# Altium PCB pcb_DPN_ControlLed.PcbDoc
Units mil, origin at the board's own origin, x right, y up, seen from the top; angles counter-clockwise.
Board outline 6475 x 3830 mil, 2 copper layers (Top Layer, Bottom Layer); 88 components, 86 nets, 316 pads, 411 vias.
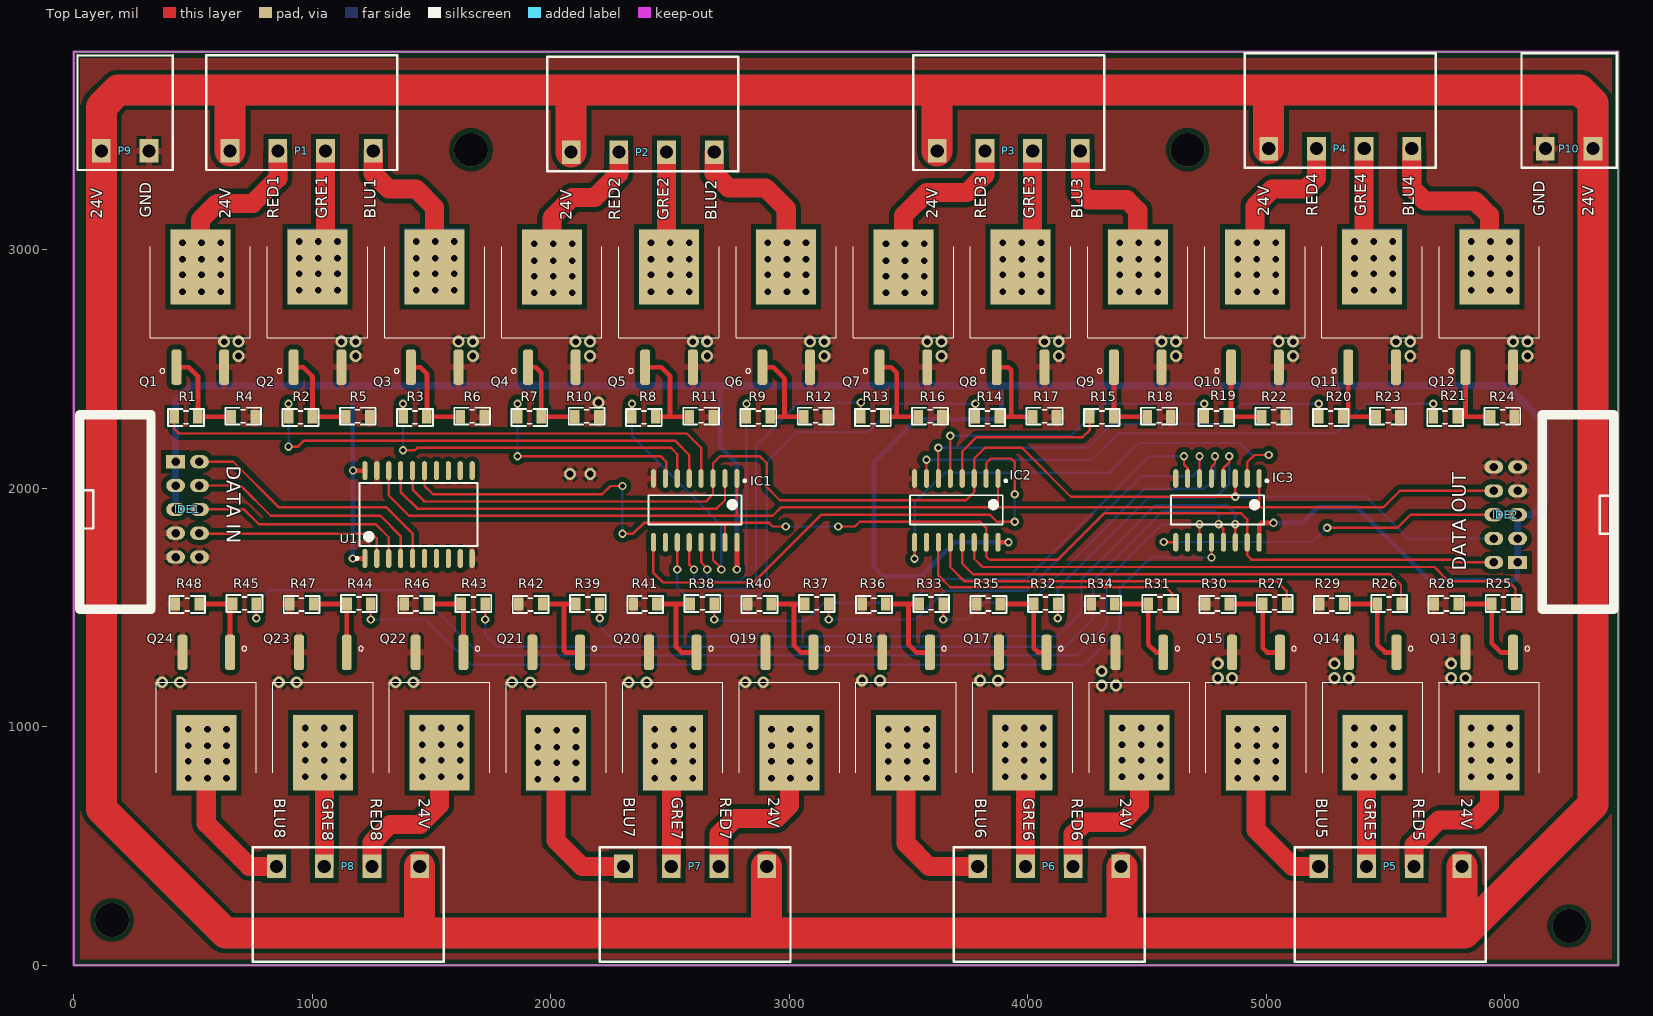
[diagram p0: Top Layer view]
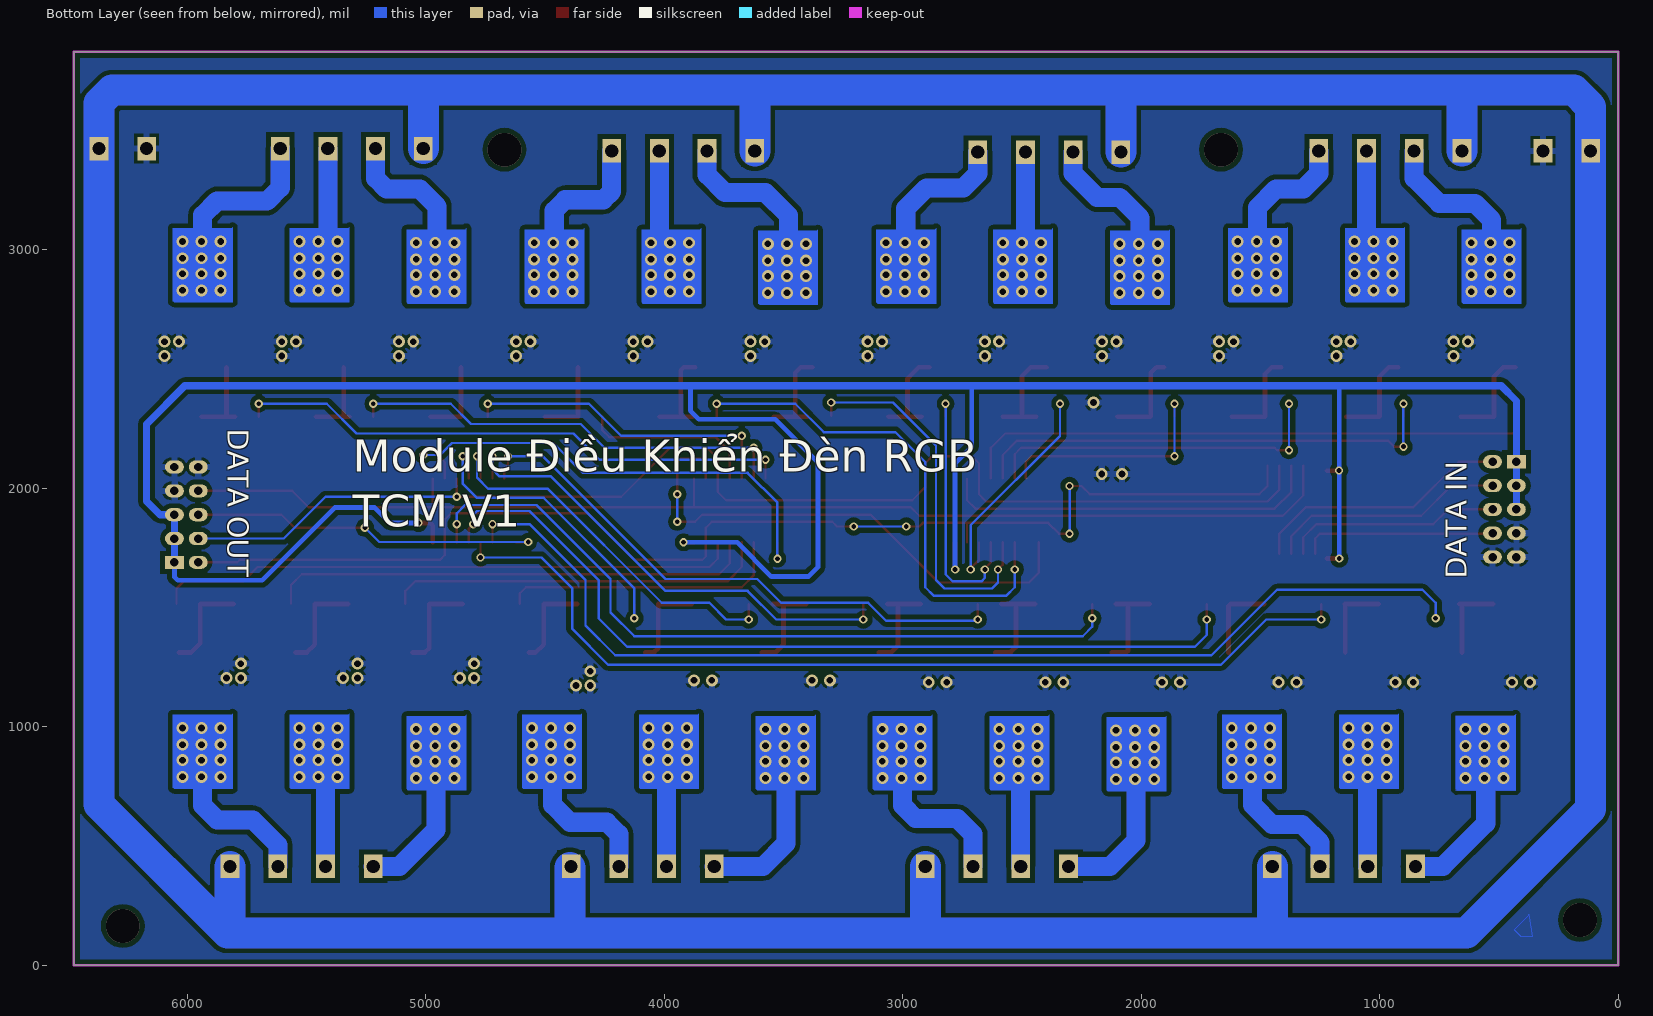
[diagram p1: Bottom Layer view, seen from below]

## Layer stack, top to bottom
Top Solder: solder mask 0.4, Solder Resist, Dk 3.5
Top Layer: signal copper 1.4
Dielectric 1: dielectric 12.6, FR-4, Dk 4.8
Bottom Layer: signal copper 1.4
Bottom Solder: solder mask 0.4, Solder Resist, Dk 3.5

## Board outline
0,0 0,3830 6475,3830 6475,0

## Design rules (kind name [scope] priority, off if disabled: settings)
Clearance [All] p1: gap=20 ignorepadtopadclearanceinfootprint=FALSE
PolygonConnect [All] p1: connectstyle=Relief reliefconductorwidth=27.56 reliefentries=4 polygonreliefangle="90 Angle" airgapwidth=11.81
RoutingVias [All] p1: holewidth=20 width=35 viastyle="Through Hole" minholewidth=20 minwidth=35 maxholewidth=20 maxwidth=35
SolderMaskExpansion [All] p1: expansion=4
Width [All] p1: maxlimit=30 minlimit=10 preferedwidth=20
30 further rules are at their usual default settings.

## Components (designator, comment, footprint, x,y, rotation, side; value= is the part's Value field where it differs from the comment)
IC1 "CD4094" CD4094 2400,2140 r270 top
IC2 "CD4094" CD4094 3495,2140 r270 top
IC3 "CD4094" CD4094 4590,2140 r270 top locked
IDE1 "IDE10" IDE10_Cong 205,1505 r0 top locked
IDE2 "IDE10" IDE10_Cong 6275,2296.34 r180 top
P1 "CON 4 EDG5.08" "CON 4 4EDG5.08" 655,3415 r0 top
P2 "CON 4 EDG5.08" "CON 4 4EDG5.08" 2085,3410 r0 top
P3 "CON 4 EDG5.08" "CON 4 4EDG5.08" 3620,3415 r0 top
P4 "CON 4 EDG5.08" "CON 4 4EDG5.08" 5010,3425 r0 top
P5 "CON 4 EDG5.08" "CON 4 4EDG5.08" 5820,415 r180 top
P6 "CON 4 EDG5.08" "CON 4 4EDG5.08" 4390,415 r180 top
P7 "CON 4 EDG5.08" "CON 4 4EDG5.08" 2905,415 r180 top
P8 "CON 4 EDG5.08" "CON 4 4EDG5.08" 1450,415 r180 top
P9 "CON 2 EDG5.08" "CON 2 2EDG5.08" 115,3415 r0 top
P10 "CON 2 EDG5.08" "CON 2 2EDG5.08" 6170,3425 r0 top
Q1 "IRF3709" D2PAK 530,2760 r0 top
Q2 "IRF3709" D2PAK 1021.36,2760 r0 top
Q3 "IRF3709" D2PAK 1512.73,2760 r0 top
Q4 "IRF3709" D2PAK 2004.09,2760 r0 top
Q5 "IRF3709" D2PAK 2495.45,2760 r0 top
Q6 "IRF3709" D2PAK 2986.82,2760 r0 top
Q7 "IRF3709" D2PAK 3478.18,2760 r0 top
Q8 "IRF3709" D2PAK 3969.54,2760 r0 top
Q9 "IRF3709" D2PAK 4460.91,2760 r0 top
Q10 "IRF3709" D2PAK 4952.27,2760 r0 top
Q11 "IRF3709" D2PAK 5443.64,2760 r0 top
Q12 "IRF3709" D2PAK 5935,2760 r0 top
Q13 "IRF3709" D2PAK 5935,1060 r180 top
Q14 "IRF3709" D2PAK 5445.91,1060 r180 top
Q15 "IRF3709" D2PAK 4956.82,1060 r180 top
Q16 "IRF3709" D2PAK 4467.73,1060 r180 top
Q17 "IRF3709" D2PAK 3978.64,1060 r180 top
Q18 "IRF3709" D2PAK 3489.55,1060 r180 top
Q19 "IRF3709" D2PAK 3000.45,1060 r180 top
Q20 "IRF3709" D2PAK 2511.36,1060 r180 top
Q21 "IRF3709" D2PAK 2022.27,1060 r180 top
Q22 "IRF3709" D2PAK 1533.18,1060 r180 top
Q23 "IRF3709" D2PAK 1044.09,1060 r180 top
Q24 "IRF3709" D2PAK 555,1060 r180 top
R1 "470R" "Tro SMD 0805" 470,2300 r0 top
R2 "470R" "Tro SMD 0805" 950,2300 r0 top
R3 "470R" "Tro SMD 0805" 1430,2300 r0 top
R4 "10k" "tro smd 0805" 710,2300 r180 top
R5 "10k" "tro smd 0805" 1190,2300 r180 top
R6 "10k" "tro smd 0805" 1670,2300 r180 top
R7 "470R" "Tro SMD 0805" 1910,2300 r0 top
R8 "470R" "Tro SMD 0805" 2390,2300 r0 top
R9 "470R" "Tro SMD 0805" 2870,2300 r0 top
R10 "10k" "tro smd 0805" 2150,2300 r180 top
R11 "10k" "tro smd 0805" 2630,2300 r180 top
R12 "10k" "tro smd 0805" 3110,2300 r180 top
R13 "470R" "Tro SMD 0805" 3350,2300 r0 top
R14 "470R" "Tro SMD 0805" 3830,2300 r0 top
R15 "470R" "Tro SMD 0805" 4310,2300 r0 top
R16 "10k" "tro smd 0805" 3590,2300 r180 top
R17 "10k" "tro smd 0805" 4070,2300 r180 top
R18 "10k" "tro smd 0805" 4550,2300 r180 top
R19 "470R" "Tro SMD 0805" 4790,2300 r0 top
R20 "470R" "Tro SMD 0805" 5270,2300 r0 top
R21 "470R" "Tro SMD 0805" 5750,2300 r0 top
R22 "10k" "tro smd 0805" 5030,2300 r180 top
R23 "10k" "tro smd 0805" 5510,2300 r180 top
R24 "10k" "tro smd 0805" 5990,2300 r180 top
R25 "470R" "Tro SMD 0805" 5995,1515 r180 top
R26 "470R" "Tro SMD 0805" 5515,1515 r180 top
R27 "470R" "Tro SMD 0805" 5035,1515 r180 top
R28 "10k" "tro smd 0805" 5755,1515 r0 top
R29 "10k" "tro smd 0805" 5275,1515 r0 top
R30 "10k" "tro smd 0805" 4795,1515 r0 top
R31 "470R" "Tro SMD 0805" 4555,1515 r180 top
R32 "470R" "Tro SMD 0805" 4075,1515 r180 top
R33 "470R" "Tro SMD 0805" 3595,1515 r180 top
R34 "10k" "tro smd 0805" 4315,1515 r0 top
R35 "10k" "tro smd 0805" 3835,1515 r0 top
R36 "10k" "tro smd 0805" 3355,1515 r0 top
R37 "470R" "Tro SMD 0805" 3115,1515 r180 top
R38 "470R" "Tro SMD 0805" 2635,1515 r180 top
R39 "470R" "Tro SMD 0805" 2155,1515 r180 top
R40 "10k" "tro smd 0805" 2875,1515 r0 top
R41 "10k" "tro smd 0805" 2395,1515 r0 top
R42 "10k" "tro smd 0805" 1915,1515 r0 top
R43 "470R" "Tro SMD 0805" 1675,1515 r180 top
R44 "470R" "Tro SMD 0805" 1195,1515 r180 top
R45 "470R" "Tro SMD 0805" 715,1515 r180 top
R46 "10k" "tro smd 0805" 1435,1515 r0 top
R47 "10k" "tro smd 0805" 955,1515 r0 top
R48 "10k" "tro smd 0805" 475,1515 r0 top
U1 "74HC245 SMD" "SOP 20" 1445,1890 r90 top

## Footprints (in the part's own frame and the unit in brackets; to place one, negate y for a bottom-side part, rotate by r counter-clockwise, add the part's x,y. Pads: shape width x height; smd on the part's side, far side on the other; paste and mask are expansions set on the pad)
CD4094 [mm]
  oval 2x0.55 smd: 1(2.507,9.652) 2(2.507,8.382) 3(2.507,7.112) 4(2.507,5.842) 5(2.507,4.572) 6(2.507,3.302) 7(2.507,2.032) 8(2.507,0.762) 9(9.304,0.762) 10(9.304,2.032) 11(9.304,3.302) 12(9.304,4.572) 13(9.304,5.842) 14(9.304,7.112) 15(9.304,8.382) 16(9.304,9.652)
  silkscreen extent 2.64,0.26 7.39,10.6, body extent 2.97,0.38 8.97,10.28, height 1.4
"CON 2 2EDG5.08" [mm]
  rect 2x2.5 hole 1.4: 1(0,0) 2(5.08,0)
  silkscreen extent -2.54,-2.03 7.62,10.21, body extent -2.5,-1.75 7.58,10.25, height 3.15
"CON 4 4EDG5.08" [mm]
  rect 2x2.5 hole 1.4: 1(0,0) 1(0,0) 2(5.08,0) 2(5.08,0) 3(10.16,0) 3(10.173,0) 4(15.24,0)
  silkscreen extent -2.54,-2.03 17.78,10.17, body extent -2.5,-1.75 17.74,10.25, height 3.15
D2PAK [mm]
  rrect53% 1.06x3.78 smd: 1(-2.54,-6.4) 3(2.54,-6.4)
  rect 6.39x8 smd paste-5 mask+0: 2(0,4.29)
  silkscreen extent -5.34,-7.05 5.34,6.42, body extent -5.08,-6.35 5.08,8.89, height 4.83
IDE10_Cong [mm]
  rect 2x1.4 hole 0.9: 1(5.623,15.413)
  oval 2x1.4 hole 0.9: 2(8.163,15.413) 3(5.623,12.873) 4(8.163,12.873) 5(5.623,10.333) 6(8.163,10.333) 7(5.623,7.793) 8(8.163,7.793) 9(5.623,5.253) 10(8.163,5.253)
  silkscreen extent -4.6,-0.3 3,20.4, body extent -4.9,-0.47 8.66,20.47, height 53.34
"SOP 20" [mm] "SOIC, 20-Leads, Body 12.60x7.50mm, Pitch 1.27mm, IPC Medium Density"
  oval 2.032x0.55 smd: 1(-4.675,5.715) 2(-4.675,4.445) 3(-4.675,3.175) 4(-4.675,1.905) 5(-4.675,0.635) 6(-4.675,-0.635) 7(-4.675,-1.905) 8(-4.675,-3.175) 9(-4.675,-4.445) 10(-4.675,-5.715) 11(4.675,-5.715) 12(4.675,-4.445) 13(4.675,-3.175) 14(4.675,-1.905) 15(4.675,-0.635) 16(4.675,0.635) 17(4.675,1.905) 18(4.675,3.175) 19(4.675,4.445) 20(4.675,5.715)
  silkscreen extent -4.8,-6.3 3.35,6.66, body extent -5.07,-6.3 5.07,6.3, height 2.25
"Tro SMD 0805" [mil]
  rect 40x55.12 smd: 1(-50,0) 2(50,0)
  silkscreen extent -75,-38 75,33, body extent -63,-33 55,22, height 21
"tro smd 0805" [mil]
  rect 40x55.12 smd: 1(-50,0) 2(50,0)
  silkscreen extent -75,-38 75,33, body extent -63,-33 55,22, height 21

## Part data
IC1 IC2 IC3: library part "CD4094 SMD", "Dán", Chung_Loai=Dán, Don_Vi=Con, Ma_Hang=MH002295, Ten_Linh_Kien="CD4094 SOP16"
IDE1 IDE2: library part "IDE 10 DT"
P1 P2 P3 P4 P5 P6 P7 P8 P9 P10: "C?m", Chung_Loai=C?m, Don_Vi=Con
  P1 P2 P3 P4 P5 P6 P7 P8: Ma_Hang=MH000979, Ten_Linh_Kien="CON 4 2EDG5.08-4P 5.08MM ( Xanh Cong)"
  P9 P10: Ma_Hang=MH000759, Ten_Linh_Kien="CON 2 2EDG5.08-2P 5.08MM ( Xanh Cong)"
Q1 Q2 Q3 Q4 Q5 Q6 Q7 Q8 Q9 Q10 Q11 Q12 Q13 Q14 Q15 Q16 Q17 Q18 Q19 Q20 Q21 Q22 Q23 Q24: library part "IRF3709S SMD", "N-Channel Power MOSFET"
R1 R2 R3 R7 R8 R9 R13 R14 R15 R19 R20 R21 R25 R26 R27 R31 R32 R33 R37 R38 R39 R43 R44 R45: library part "Tro 0805 5% 470R", "Dán", Chung_Loai=Dán, Don_Vi=Con, Ma_Hang=MH005341, So_Chan=2, Ten_Linh_Kien="Tr? 0805 5% 470R"
R4 R5 R6 R10 R11 R12 R16 R17 R18 R22 R23 R24 R28 R29 R30 R34 R35 R36 R40 R41 R42 R46 R47 R48: library part "Tro 0805 5% 10k", "Dán", Chung_Loai=Dán, Don_Vi=Con, Ma_Hang=MH005239, So_Chan=2, Ten_Linh_Kien="Tr? 0805 5% 10k"
U1: "Dán", Chung_Loai=Dán, Don_Vi=Con, Ma_Hang=MH003571, Ten_Linh_Kien="74HC245DW SSOP20 5.2MM"

## Via types
v1: diameter 50, hole 28, Top Layer to Bottom Layer, 288 vias
v2: diameter 50, hole 28, Top Layer to Bottom Layer, tented both sides, 67 vias
v3: diameter 35, hole 20, Top Layer to Bottom Layer, tented both sides, 52 vias
v4: diameter 141.73, hole 141.73, Top Layer to Bottom Layer, tented both sides, 4 vias

## Nets (pads, with @x,y where several pads share a name; then routed paths per layer and width w, separated by ;. In a path a pad name is that pad's centre, name@x,y a point inside that pad or via, vN(x,y) a via of type N, cw(c..) or ccw(c..) an arc to the next point about the centre after c; other vN are vias at no path point)
5V: IC1.16 IC2.16 IC3.16 IDE1.1 IDE1.3 IDE1.5 IDE2.1 IDE2.3 IDE2.5 U1.1 U1.20 | length 11920.6
  Top Layer w20: v3(1169.05,1705.95) U1.1 ; v3(1170,2075) 1170.94,2074.06 U1.20 ; v3(2780,1660) IC1.16 ; IC2.16 v3(3918.7,1773.7) ; IC3.16 4970,1845 4980,1855 v3(5030,1855)
  Bottom Layer w20: v3(1169.05,1705.95) 1169.05,2425.95 ; 2710,2430 2710,2175 2780,2105 v3(2780,1660) ; 3890,2430 3890,2325 3855,2290 3535,2290 3355,2110 3355,1670 3395,1630 3550,1630 3693.7,1773.7 v3(3918.7,1773.7) ; v3(5030,1855) 5150,1855 5215,1920 5380,1920 5685,1615 6040,1615 6053.62,1628.62 IDE2.1
  Bottom Layer w30: IDE1.5 IDE1.3 IDE1.1 426.38,2366.38 490,2430 2710,2430 3890,2430 6010,2430 6170,2270 6170,1945 6114.53,1889.53 IDE2.5 IDE2.3 IDE2.1
24V: P1.1 P2.1 P3.1 P4.1 P5.1 P6.1 P7.1 P8.1 P9.1 P10.2 | length 83783.4
  Top Layer w130: 115,655 635,135 ; 115,655 P9.1 ; 115,655 635,135 ; 115,655 P9.1 ; P9.1 115,3600 ; P9.1 115,3600 ; 115,3600 185,3670 ; 115,3600 185,3670 ; 185,3670 3620,3670 ; 185,3670 3620,3670 ; 635,135 1445,135 635,135 ; 1450,135 1450,415 1450,135 ; 1450,135 4395,135 ; 1450,135 4395,135 ; 3620,3670 6315,3670 ; 3620,3670 3620,3415 3620,3670 ; 3620,3670 6315,3670 ; 4395,135 4395,410 4395,135 ; 4395,135 5820,135 ; 4395,135 5820,135 ; 5820,135 5820,415 5820,135 ; 5820,135 5830,135 ; 5820,135 5830,135 ; 5830,135 6370,675 ; 5830,135 6370,675 ; 6315,3670 6370,3615 ; 6315,3670 6370,3615 ; 6370,675 P10.2 ; 6370,675 P10.2 ; P10.2 6370,3615 ; P10.2 6370,3615 ; P1.1@655,3415 655,3640 P1.1@655,3415 ; P2.1@2085,3410 2085,3650 P2.1@2085,3410 ; 2905,140 2905,415 2905,140 ; P4.1@5010,3425 5010,3660 P4.1@5010,3425
  Bottom Layer w130: 115,655 P9.1 ; 115,655 P9.1 ; 115,655 635,135 ; 115,655 635,135 ; P9.1 115,3600 ; P9.1 115,3600 ; 115,3600 185,3670 ; 115,3600 185,3670 ; 185,3670 3620,3670 ; 185,3670 3620,3670 ; 635,135 1445,135 635,135 ; 1450,135 1450,415 1450,135 ; 1450,135 4395,135 ; 1450,135 4395,135 ; 3620,3670 3620,3415 3620,3670 ; 3620,3670 6315,3670 ; 3620,3670 6315,3670 ; 4395,135 4395,410 4395,135 ; 4395,135 5820,135 ; 4395,135 5820,135 ; 5820,135 5830,135 ; 5820,135 5830,135 ; 5820,135 5820,415 5820,135 ; 5830,135 6370,675 ; 5830,135 6370,675 ; 6315,3670 6370,3615 ; 6315,3670 6370,3615 ; 6370,675 P10.2 ; 6370,675 P10.2 ; P10.2 6370,3615 ; P10.2 6370,3615 ; P1.1@655,3415 655,3640 P1.1@655,3415 ; P2.1@2085,3410 2085,3650 P2.1@2085,3410 ; 2905,140 2905,415 2905,140 ; P4.1@5010,3425 5010,3660 P4.1@5010,3425
4094_Clock: IC1.3 IC2.3 IC3.3 IDE2.4 U1.16 | length 5366.7
  Top Layer w10: U1.16@1420,2094.06 U1.16 1420,1995 1470,1945 2650,1945 2680,1975 IC1.3 2680,2105 2710,2135 2875,2135 2905,2105 2905,2005 2960,1950 3740,1950 3775,1985 IC2.3 3775,2125 3820,2170 3975,2170 4180,1965 v3(4870,1965) ; IC3.3 4870,1980 4865,1975 v3@4870,1970 ; v3(4870,1965) 4875,1965 v3@4870,1970 ; v3(4870,1965) v3@4870,1970
  Bottom Layer w10: v3(4870,1965) 5420,1965 5595.47,1789.53 IDE2.4
4094_Data: IC1.2 U1.17 | length 1603.8
  Top Layer w10: U1.17@1370,2094.06 U1.17 1370,1985 1440,1915 2695,1915 2730,1950 IC1.2
4094_Data_OUT: IC3.9 IDE2.6 | length 1481.6
  Top Layer w10: v3(4570,1775) 4571.3,1773.7 IC3.9 ; v3(5255,1835) 5550,1835 5604.53,1889.53 IDE2.6
  Bottom Layer w10: v3(4570,1775) 5195,1775 v3(5255,1835)
4094_Latch: IC1.1 IC2.1 IC3.1 IDE2.8 U1.18 | length 5235.1
  Top Layer w10: U1.18@1320,2094.06 U1.18 1320,1970 1405,1885 2780,1885 ; IC1.1 2780,1885 ; IC2.1 3875,1920 ; IC3.1 4970,1920 ; IDE2.8 5559.53,1989.53 5490,1920 4970,1920 ; 2780,1885 2930,1885 2965,1920 3875,1920 ; 3875,1920 4970,1920
Clock_IN: IDE1.4 U1.4 | length 1005.4
  Top Layer w10: IDE1.4 698.19,2011.81 825,1885 1285,1885 1370,1800 U1.4@1370,1725.95
Data_IN: IDE1.6 U1.3 | length 911.1
  Top Layer w10: IDE1.6 713.19,1911.81 775,1850 1265,1850 1320,1795 U1.3@1320,1725.95
GND: IC1.8 IC2.8 IC3.8 IDE1.7 IDE1.9 IDE1.10 IDE2.7 IDE2.9 IDE2.10 P9.2 P10.1 Q1.3 Q2.3 Q3.3 Q4.3 Q5.3 Q6.3 Q7.3 Q8.3 Q9.3 Q10.3 Q11.3 Q12.3 Q13.3 Q14.3 Q15.3 Q16.3 Q17.3 Q18.3 Q19.3 Q20.3 Q21.3 Q22.3 Q23.3 Q24.3 R4.1 R5.1 R6.1 R10.1 R11.1 R12.1 R16.1 R17.1 R18.1 R22.1 R23.1 R24.1 R28.1 R29.1 R30.1 R34.1 R35.1 R36.1 R40.1 R41.1 R42.1 R46.1 R47.1 R48.1 U1.10 U1.19
  other v2: 4310,1173.03 4370,1173.03 370,1186.97 445,1186.97 859.09,1186.97 934.09,1186.97 1348.18,1186.97 1423.18,1186.97 1837.27,1186.97 1912.27,1186.97 2326.36,1186.97 2401.36,1186.97 2815.45,1186.97 2890.45,1186.97 3305,1195 3380,1195 3800,1195 3875,1195 4796.82,1205 4856.82,1205 5285.91,1205 5345.91,1205 5775,1205 5835,1205 4310,1233.03 4796.82,1265 5285.91,1265 5775,1265 2080,2060 2165,2060 2200,2360 690,2555 1181.36,2555 1672.73,2555 2164.09,2555 2655.45,2555 3146.82,2555 3638.18,2555 4129.55,2555 4620.91,2555 5112.27,2555 5603.64,2555 6095,2555 630,2615 690,2615 1121.36,2615 1181.36,2615 1612.73,2615 1672.73,2615 2104.09,2615 2164.09,2615 2595.45,2615 2655.45,2615 3086.82,2615 3146.82,2615 3578.18,2615 3638.18,2615 4069.54,2615 4129.55,2615 4560.91,2615 4620.91,2615 5052.27,2615 5112.27,2615 5543.64,2615 5603.64,2615 6035,2615 6095,2615
Latch_IN: IDE1.8 U1.2 | length 814.2
  Top Layer w10: IDE1.8@528.19,1810 1250,1810 1270,1790 U1.2@1270,1725.95
LED_BLU1: IC1.6 R3.1 | length 1522.2
  Top Layer w10: v3@1375,2160 v3(1380,2160) 1430,2160 1440,2170 2503.28,2170 2530,2143.28 IC1.6 ; R3.1 v3(1380,2355)
  Bottom Layer w10: v3(1380,2160) v3(1380,2355)
LED_BLU2: IC1.13 R9.1 | length 1107.7
  Top Layer w10: IC1.13 2630,1690 v3@2655,1665 ; R9.1 v3(2820,2355)
  Bottom Layer w10: v3(2655,1660) 2655,1625 2670,1610 2790,1610 2820,1640 v3(2820,2355)
LED_BLU3: IC2.4 R15.1 | length 741
  Top Layer w10: IC2.4 3725,2155 3785,2215 4230,2215 4260,2245 R15.1
LED_BLU4: IC2.7 R21.1 | length 2356
  Top Layer w10: IC2.7 v3(3575,2120) ; R21.1 v3(5700,2355)
  Bottom Layer w10: v3(3575,2120) 4270,2120 4380,2230 5290,2230 5415,2355 v3(5700,2355)
LED_BLU5: IC2.12 R27.1 | length 1610.1
  Top Layer w10: IC2.12 3675,1670 3735,1610 5045,1610 5085,1570 R27.1
LED_BLU6: IC3.5 R33.1 | length 1641.4
  Top Layer w10: v3(3645,1450) R33.1 ; IC3.5 4770,2090 4785,2105 v3(4785,2135)
  Bottom Layer w10: v3(3645,1450) 3740,1450 3810,1520 4010,1520 4487.5,1997.5 4737.5,1997.5 4785,2045 v3(4785,2135)
LED_BLU7: IC3.14 R39.1 | length 3222.2
  Top Layer w10: v3@2205,1450 v3(2205,1455) R39.1 ; IC3.14 v3@4870,1845
  Bottom Layer w10: v3(2205,1455) 2205,1420 2245,1380 4125,1380 4225,1480 4225,1620 4535,1930 4835,1930 4870,1895 v3(4870,1850)
LED_BLU8: IC3.11 R45.1 | length 4632.1
  Top Layer w10: v3(765,1455) R45.1 ; IC3.11 v3(4720,1850)
  Bottom Layer w10: v3(765,1455) 765,1520 820,1575 1430,1575 1705,1300 4205,1300 4330,1425 4330,1615 4565,1850 v3(4720,1850)
LED_GRE1: IC1.5 R2.1 | length 2048.9
  Top Layer w10: v3(900,2175) 940,2175 965,2200 2520,2200 2580,2140 IC1.5 ; R2.1 v3(900,2355)
  Bottom Layer w10: v3(900,2175) v3(900,2355)
LED_GRE2: IC1.14 R8.1 | length 1028.5
  Top Layer w10: R8.1 v3(2340,2355) ; IC1.14 2680,1700 v3@2715,1665
  Bottom Layer w10: v3(2340,2355) 2340,2220 2715,1845 v3(2715,1660)
LED_GRE3: IC1.11 R14.1 | length 2144.2
  Top Layer w10: v3@2530,1665 IC1.11 ; R14.1 v3(3780,2355)
  Bottom Layer w10: v3(2530,1660) 2530,1585 2565,1550 2870,1550 2905,1585 2905,2110 3030,2235 3330,2235 3450,2355 v3(3780,2355)
LED_GRE4: IC2.6 R20.1 | length 1855.3
  Top Layer w10: IC2.6 v3(3625,2170) ; R20.1 v3(5220,2355)
  Bottom Layer w10: v3(3625,2170) 4250,2170 4350,2270 4810,2270 4895,2355 v3(5220,2355)
LED_GRE5: IC2.13 R26.1 | length 2046
  Top Layer w10: IC2.13 3725,1685 3770,1640 5520,1640 5565,1595 R26.1
LED_GRE6: IC3.4 R32.1 | length 1306.3
  Top Layer w10: v3(4125,1455) R32.1 ; IC3.4 4820,2085 4845,2110 v3(4845,2135)
  Bottom Layer w10: v3(4125,1455) 4125,1580 4505,1960 4785,1960 4845,2020 v3(4845,2135)
LED_GRE7: IC3.7 R38.1 | length 2412.8
  Top Layer w10: v3(2685,1450) R38.1 ; v3@4655,2125 4655,2100 4670,2085 IC3.7
  Bottom Layer w10: v3(2685,1450) 2690,1445 3070,1445 3145,1520 3510,1520 3610,1620 3995,1620 4510,2135 v3(4655,2135)
LED_GRE8: IC3.12 R44.1 | length 4018.4
  Top Layer w10: v3(1245,1450) R44.1 ; v3(4770,1710) IC3.12
  Bottom Layer w10: v3(1245,1450) 1475,1450 1665,1260 4235,1260 4385,1410 4385,1580 4515,1710 v3(4770,1710)
LED_RED1: IC1.4 R1.1 | length 2421.8
  Top Layer w10: R1.1 420,2250 440,2230 2570,2230 2630,2170 IC1.4
LED_RED2: IC1.7 R7.1 | length 979.7
  Top Layer w10: v3(1860,2135) 2460,2135 2483.28,2111.72 2483.28,2044.58 IC1.7 ; R7.1 v3(1860,2355)
  Bottom Layer w10: v3(1860,2135) v3(1860,2355)
LED_RED3: IC1.12 R13.1 | length 1596.4
  Top Layer w10: IC1.12 2580,1680 v3(2600,1660) ; R13.1@3300,2305 v3(3300,2360)
  Bottom Layer w10: v3(2600,1660) 2600,1605 2625,1580 2825,1580 2860,1615 2860,2180 3040,2360 v3(3300,2360)
LED_RED4: IC2.5 R19.1 | length 1354.6
  Top Layer w10: IC2.5 v3(3675,2220) ; R19.1 v3(4740,2355)
  Bottom Layer w10: v3(3675,2220) 4180,2220 4315,2355 v3(4740,2355)
LED_RED5: IC2.14 R25.1 | length 2455.5
  Top Layer w10: IC2.14 3775,1705 3810,1670 5705,1670 5765,1610 6015,1610 6045,1580 R25.1
LED_RED6: IC2.11 R31.1 | length 1194.8
  Top Layer w10: IC2.11 3625,1635 3675,1585 4580,1585 4605,1560 R31.1
LED_RED7: IC3.6 R37.1 | length 2024.7
  Top Layer w10: v3(3165,1450) R37.1 ; IC3.6 v3@4720,2130
  Bottom Layer w10: v3(3165,1450) 3530,1450 3650,1570 3995,1570 4475,2050 4690,2050 4720,2080 v3(4720,2135)
LED_RED8: IC3.13 R43.1 | length 3686.3
  Top Layer w10: v3(1725,1450) R43.1 ; v3(4800,1850) 4820,1830 IC3.13
  Bottom Layer w10: v3(1725,1450) 1725,1385 1775,1335 4155,1335 4275,1455 4275,1615 4565,1905 4785,1905 4800,1890 v3(4800,1850)
NetIC1_9: IC1.9 IC2.2 | length 2238.9
  Top Layer w10: IC1.9 2430,1645 2470,1605 2850,1605 3135,1890 3840,1890 3870,1860 v3(3945,1860) ; IC2.2 3825,2105 3845,2125 3930,2125 3945,2110 v3(3945,1975)
  Bottom Layer w10: v3(3945,1860) v3(3945,1975)
NetIC2_9: IC2.9 IC3.2 | length 2084.1
  Top Layer w10: v3(3525,1705) IC2.9 ; IC3.2 4920,2110 4950,2140 v3(5010,2140)
  Bottom Layer w10: v3(3525,1705) 3525,1940 3650,2065 4340,2065 4465,2190 4890,2190 4940,2140 v3(5010,2140)
NetQ1_1: Q1.1 R1.2 R4.2 | length 415.8
  Top Layer w20: Q1.1 481.97,2508.03 520,2470 R1.2 R4.2
NetQ2_1: Q2.1 R2.2 R5.2 | length 404.4
  Top Layer w20: Q2.1 961.97,2508.03 1000,2470 R2.2 R5.2
NetQ3_1: Q3.1 R3.2 R6.2 | length 398.9
  Top Layer w20: Q3.1 1451.97,2508.03 1480,2480 R3.2 R6.2
NetQ4_1: Q4.1 R7.2 R10.2 | length 390.4
  Top Layer w20: Q4.1 1936.97,2508.03 1960,2485 R7.2 R10.2
NetQ5_1: Q5.1 R8.2 R11.2 | length 430.3
  Top Layer w20: Q5.1 2416.97,2508.03 2461.97,2508.03 2500,2470 2500,2300 ; R8.2 2500,2300 ; R11.2 2500,2300
NetQ6_1: Q6.1 R9.2 R12.2 | length 413.1
  Top Layer w20: Q6.1 2931.97,2508.03 2980,2460 2980,2300 ; R9.2 2980,2300 ; R12.2 2980,2300
NetQ7_1: Q7.1 R13.2 R16.2 | length 406.4
  Top Layer w20: Q7.1 3426.97,2508.03 3450,2485 3450,2300 ; R13.2 3450,2300 ; R16.2 3450,2300
NetQ8_1: Q8.1 R14.2 R17.2 | length 400.9
  Top Layer w20: Q8.1 3916.97,2508.03 3930,2495 3930,2300 ; R14.2 3930,2300 ; R17.2 3930,2300
NetQ9_1: Q9.1 R15.2 R18.2 | length 347.1
  Top Layer w20: R15.2 R18.2 ; R15.2@4360.91,2300.91 Q9.1
NetQ10_1: Q10.1 R19.2 R22.2 | length 323.5
  Top Layer w20: R19.2@4852.27,2300 R22.2 ; R19.2@4852.27,2312.27 Q10.1
NetQ11_1: Q11.1 R20.2 R23.2 | length 341.7
  Top Layer w20: R20.2 R23.2 ; 5343.64,2306.36 Q11.1
NetQ12_1: Q12.1 R21.2 R24.2 | length 343
  Top Layer w20: R21.2 R24.2 ; 5835,2305 Q12.1
NetQ13_1: Q13.1 R25.2 R28.2 | length 410.8
  Top Layer w20: R28.2 R25.2 5945,1350 5983.03,1311.97 Q13.1
NetQ14_1: Q14.1 R26.2 R29.2 | length 404.6
  Top Layer w20: R29.2 R26.2 5465,1345 5498.03,1311.97 Q14.1
NetQ15_1: Q15.1 R27.2 R30.2 | length 404.3
  Top Layer w20: R30.2 R27.2 4985,1330 5003.03,1311.97 Q15.1
NetQ16_1: Q16.1 R31.2 R34.2 | length 386.4
  Top Layer w20: R34.2 R31.2 4505,1345 4538.03,1311.97 Q16.1
NetQ17_1: Q17.1 R32.2 R35.2 | length 386.1
  Top Layer w20: R35.2 R32.2 4025,1330 4043.03,1311.97 Q17.1
NetQ18_1: Q18.1 R33.2 R36.2 | length 413.2
  Top Layer w20: R36.2 3500,1515 ; R33.2 3500,1515 ; Q18.1 3533.03,1311.97 3500,1345 3500,1515
NetQ19_1: Q19.1 R37.2 R40.2 | length 407.1
  Top Layer w20: R40.2 3020,1515 ; R37.2 3020,1515 ; Q19.1 3048.03,1311.97 3020,1340 3020,1515
NetQ20_1: Q20.1 R38.2 R41.2 | length 415.9
  Top Layer w20: R41.2 2525,1515 ; R38.2 2540,1515 2525,1515 ; Q20.1 2548.03,1311.97 2525,1335 2525,1515
NetQ21_1: Q21.1 R39.2 R42.2 | length 405.6
  Top Layer w20: R42.2 2055,1515 ; R39.2 2055,1515 ; Q21.1 2063.03,1311.97 2055,1320 2055,1515
NetQ22_1: Q22.1 R43.2 R46.2 | length 334.8
  Top Layer w20: R46.2 R43.2 ; Q22.1 R43.2@1633.18,1506.82
NetQ23_1: Q23.1 R44.2 R47.2 | length 342.1
  Top Layer w20: R47.2 R44.2 ; Q23.1 R44.2@1144.09,1514.09
NetQ24_1: Q24.1 R45.2 R48.2 | length 333
  Top Layer w20: R48.2 R45.2 ; Q24.1 R45.2@655,1505
OE: IC1.15 IC2.15 IC3.15 IDE2.2 U1.15 | length 5296.4
  Top Layer w10: U1.15@1470,2094.06 U1.15 1470,2010 1505,1975 2215,1975 2250,2010 v3(2300,2010) ; v3@2305,1810 2345,1810 2390,1855 2730,1855 ; IC1.15 2730,1855 ; v3(2985,1840) 2930,1840 2915,1855 2730,1855 ; v3(3205,1840) 3275,1840 3295,1860 3800,1860 3825,1835 IC2.15 3825,1715 3840,1700 4125,1700 4320,1895 4895,1895 4920,1870 IC3.15 4920,1720 4940,1700 5780,1700 5790.47,1689.53 IDE2.2
  Bottom Layer w10: v3(2300,1810) v3(2300,2010) ; v3(2985,1840) v3(3205,1840)
OE_IN: IDE1.2 U1.5 | length 1102.7
  Top Layer w10: IDE1.2 668.19,2111.81 860,1920 1310,1920 1420,1810 U1.5@1420,1725.95
OUT_BLU1: P1.4 Q3.2 | length 1320.4
  Top Layer w80: P1.4 1255,3320 1320,3255 1435,3255 1512.73,3177.27 Q3.2
  Bottom Layer w80: P1.4 1255,3320 1320,3255 1435,3255 1512.73,3177.27 1512.73,2928.9
  other v1: 1435,2830 1515,2830 1595,2830 1435,2900 1515,2900 1595,2900 1435,2965 1515,2965 1595,2965 1435,3035 1515,3035 1595,3035
OUT_BLU2: P2.4 Q6.2 | length 1393.8
  Top Layer w80: P2.4 2685,3320 2745,3260 2900,3260 2986.82,3173.18 Q6.2
  Bottom Layer w80: P2.4 2685,3320 2745,3260 2900,3260 2986.82,3173.18 2986.82,2928.9
  other v1: 2910,2825 2990,2825 3070,2825 2910,2895 2990,2895 3070,2895 2910,2960 2990,2960 3070,2960 2910,3030 2990,3030 3070,3030
OUT_BLU3: P3.4 Q9.2 | length 1359.2
  Top Layer w80: P3.4 4220,3245 4255,3210 4415,3210 4460.91,3164.09 Q9.2
  Bottom Layer w80: P3.4 4220,3245 4255,3210 4415,3210 4460.91,3164.09 4460.91,2928.9
  other v1: 4385,2825 4465,2825 4545,2825 4385,2895 4465,2895 4545,2895 4385,2960 4465,2960 4545,2960 4385,3030 4465,3030 4545,3030
OUT_BLU4: P4.4 Q12.2 | length 1507.5
  Top Layer w80: P4.4 5610,3260 5665,3205 5875,3205 5935,3145 Q12.2
  Bottom Layer w80: P4.4 5610,3260 5665,3205 5875,3205 5935,3145 5935,2928.9
  other v1: 5860,2830 5940,2830 6020,2830 5860,2900 5940,2900 6020,2900 5860,2965 5940,2965 6020,2965 5860,3035 5940,3035 6020,3035
OUT_BLU5: P5.4 Q15.2 | length 1299.1
  Top Layer w80: Q15.2 4956.82,568.18 5110,415 P5.4
  Bottom Layer w80: 4956.82,891.1 4956.82,568.18 5110,415 P5.4
  other v1: 4880,785 4960,785 5040,785 4880,855 4960,855 5040,855 4880,920 4960,920 5040,920 4880,990 4960,990 5040,990
OUT_BLU6: P6.4 Q18.2 | length 1441.3
  Top Layer w80: Q18.2 3489.55,510.46 3585,415 P6.4
  Bottom Layer w80: 3489.55,891.1 3489.55,510.45 3585,415 P6.4
  other v1: 3415,785 3495,785 3575,785 3415,855 3495,855 3575,855 3415,920 3495,920 3575,920 3415,990 3495,990 3575,990
OUT_BLU7: P7.4 Q21.2 | length 1391.4
  Top Layer w80: Q21.2 2022.27,522.73 2130,415 P7.4
  Bottom Layer w80: v1@2022.27,891.1 2022.27,522.73 2130,415 P7.4
  other v1: 1945,780 2025,780 2105,780 1945,850 2025,850 2105,850 1945,915 2025,915 2105,915 1945,985 2025,985 2105,985
OUT_BLU8: P8.4 Q24.2 | length 1331.3
  Top Layer w80: Q24.2 555,595 735,415 P8.4
  Bottom Layer w80: 555,891.1 555,595 735,415 P8.4
  other v1: 480,785 560,785 640,785 480,855 560,855 640,855 480,920 560,920 640,920 480,990 560,990 640,990
OUT_GRE1: P1.3 Q2.2 | length 904.9
  Top Layer w80: Q2.2@1055,2962.53 P1.3@1055,3415
  Bottom Layer w80: 1055,2962.53 P1.3@1055,3415
  other v1: 945,2830 1025,2830 1105,2830 945,2900 1025,2900 1105,2900 945,2965 1025,2965 1105,2965 945,3035 1025,3035 1105,3035
OUT_GRE2: P2.3 Q5.2 | length 941.3
  Top Layer w80: Q5.2@2485,2939.35 P2.3@2485,3410
  Bottom Layer w80: 2485,2939.35 P2.3@2485,3410
  other v1: 2420,2825 2500,2825 2580,2825 2420,2895 2500,2895 2580,2895 2420,2960 2500,2960 2580,2960 2420,3030 2500,3030 2580,3030
OUT_GRE3: P3.3 Q8.2 | length 871.3
  Top Layer w80: Q8.2@4020,2979.35 P3.3@4020,3415
  Bottom Layer w80: 4020,2979.35 P3.3@4020,3415
  other v1: 3895,2825 3975,2825 4055,2825 3895,2895 3975,2895 4055,2895 3895,2960 3975,2960 4055,2960 3895,3030 3975,3030 4055,3030
OUT_GRE4: P4.3 Q11.2 | length 924.9
  Top Layer w80: Q11.2@5410,2962.53 P4.3@5410,3425
  Bottom Layer w80: 5410,2962.53 P4.3@5410,3425
  other v1: 5370,2830 5450,2830 5530,2830 5370,2900 5450,2900 5530,2900 5370,2965 5450,2965 5530,2965 5370,3035 5450,3035 5530,3035
OUT_GRE5: P5.3 Q14.2 | length 900.4
  Top Layer w80: P5.3@5420,415 Q14.2@5420,865.19
  Bottom Layer w80: P5.3@5420,415 5420,865.19
  other v1: 5370,790 5450,790 5530,790 5370,860 5450,860 5530,860 5370,925 5450,925 5530,925 5370,995 5450,995 5530,995
OUT_GRE6: P6.3 Q17.2 | length 929.5
  Top Layer w80: P6.3@3990,415 Q17.2@3990,879.74
  Bottom Layer w80: P6.3@3990,415 v1@3990,879.74
  other v1: 3905,790 3985,790 4065,790 3905,860 3985,860 4065,860 3905,925 3985,925 4065,925 3905,995 3985,995 4065,995
OUT_GRE7: P7.3 Q20.2 | length 939.5
  Top Layer w80: P7.3@2505,415 Q20.2@2505,884.74
  Bottom Layer w80: P7.3@2505,415 2505,884.74
  other v1: 2435,785 2515,785 2595,785 2435,855 2515,855 2595,855 2435,920 2515,920 2595,920 2435,990 2515,990 2595,990
OUT_GRE8: P8.3 Q23.2 | length 940.4
  Top Layer w80: P8.3@1050,415 Q23.2@1050,885.19
  Bottom Layer w80: P8.3@1050,415 1050,885.19
  other v1: 970,790 1050,790 1130,790 970,860 1050,860 1130,860 970,925 1050,925 1130,925 970,995 1050,995 1130,995
OUT_RED1: P1.2 Q1.2 | length 1417.2
  Top Layer w80: Q1.2 530,3125 600,3195 750,3195 855,3300 P1.2@855,3415
  Bottom Layer w80: 530,2928.9 530,3125 600,3195 750,3195 855,3300 P1.2@855,3415
  other v1: 455,2825 535,2825 615,2825 455,2895 535,2895 615,2895 455,2960 535,2960 615,2960 455,3030 535,3030 615,3030
OUT_RED2: P2.2 Q4.2 | length 1306.2
  Top Layer w80: Q4.2 2004.09,3134.09 2090,3220 2185,3220 2285,3320 P2.2@2285,3410
  Bottom Layer w80: 2004.09,2928.9 2004.09,3134.09 2090,3220 2185,3220 2285,3320 P2.2@2285,3410
  other v1: 1930,2820 2010,2820 2090,2820 1930,2890 2010,2890 2090,2890 1930,2955 2010,2955 2090,2955 1930,3025 2010,3025 2090,3025
OUT_RED3: P3.2 Q7.2 | length 1454.5
  Top Layer w80: Q7.2 3478.18,3143.18 3575,3240 3745,3240 3820,3315 P3.2@3820,3415
  Bottom Layer w80: 3478.18,2928.9 3478.18,3143.18 3575,3240 3745,3240 3820,3315 P3.2@3820,3415
  other v1: 3405,2820 3485,2820 3565,2820 3405,2890 3485,2890 3565,2890 3405,2955 3485,2955 3565,2955 3405,3025 3485,3025 3565,3025
OUT_RED4: P4.2 Q10.2 | length 1369.7
  Top Layer w80: Q10.2 4952.27,3182.27 5025,3255 5165,3255 5210,3300 P4.2@5210,3425
  Bottom Layer w80: 4952.27,2928.9 4952.27,3182.27 5025,3255 5165,3255 5210,3300 P4.2@5210,3425
  other v1: 4880,2825 4960,2825 5040,2825 4880,2895 4960,2895 5040,2895 4880,2960 4960,2960 5040,2960 4880,3030 4960,3030 5040,3030
OUT_RED5: P5.2 Q13.2 | length 1388.9
  Top Layer w80: P5.2@5620,415 5620,505 5725,610 5875,610 5935,670 Q13.2
  Bottom Layer w80: P5.2@5620,415 5620,505 5725,610 5875,610 5935,670 5935,891.1
  other v1: 5860,790 5940,790 6020,790 5860,860 5940,860 6020,860 5860,925 5940,925 6020,925 5860,995 5940,995 6020,995
OUT_RED6: P6.2 Q16.2 | length 1363.9
  Top Layer w80: P6.2@4190,415 4190,550 4240,600 4395,600 4467.73,672.73 Q16.2
  Bottom Layer w80: P6.2@4190,415 4190,550 4240,600 4395,600 4467.73,672.73 4467.73,891.1
  other v1: 4395,790 4475,790 4555,790 4395,860 4475,860 4555,860 4395,925 4475,925 4555,925 4395,995 4475,995 4555,995
OUT_RED7: P7.2 Q19.2 | length 1402
  Top Layer w80: P7.2@2705,415 2705,550 2770,615 2945,615 3000.45,670.46 Q19.2
  Bottom Layer w80: P7.2@2705,415 2705,550 2770,615 2945,615 3000.45,670.45 3000.45,891.1
  other v1: 2925,785 3005,785 3085,785 2925,855 3005,855 3085,855 2925,920 3005,920 3085,920 2925,990 3005,990 3085,990
OUT_RED8: P8.2 Q22.2 | length 1333.2
  Top Layer w80: P8.2@1250,415 1250,515 1325,590 1450,590 1533.18,673.18 Q22.2
  Bottom Layer w80: P8.2@1250,415 1250,515 1325,590 1450,590 1533.18,673.18 1533.18,891.1
  other v1: 1460,790 1540,790 1620,790 1460,860 1540,860 1620,860 1460,925 1540,925 1620,925 1460,995 1540,995 1620,995
pads on no net: IC1.10 IC2.10 IC3.10 U1.6 U1.7 U1.8 U1.9 U1.11 U1.12 U1.13 U1.14
copper on no net:
  other v4: 6270,165 160,190 1665,3420 4670,3420

## Polygon pours and split planes (outlines as drawn)
GND on Top Layer "gnd_top" (solid, pour order 0): 0,0 0,3830 6475,3830 6475,0
no net on Bottom Layer "Bottom Layer-No Net" (solid, pour order 6): 360,120 405,120 435,150 375,210 375,215
no net on Bottom Layer "Bottom Layer-No Net" (solid, pour order 4): 432.5,1047.5 435,1045 680,1045 680,735 430,735
no net on Bottom Layer "Bottom Layer-No Net" (solid, pour order 2): 430,1050 435,1045 680,1045 680,735 430,735
GND on Bottom Layer "gnd_bot" (solid, pour order 1): 0,0 0,3830 6475,3830 6475,0

## Keep-outs
Keep-Out Layer:
  the board outline again, w10

## Other copper
Bottom Layer:
  region net OUT_RED1: 405,2775 650,2775 655,2780 655,3085 410,3085 405,3090
  region net OUT_GRE1: 895,2780 1140,2780 1145,2785 1145,3090 900,3090 895,3095
  region net OUT_BLU1: 1385,2780 1630,2780 1635,2785 1635,3090 1390,3090 1385,3095
  region net OUT_RED2: 1880,2770 2125,2770 2130,2775 2130,3080 1885,3080 1880,3085
  region net OUT_GRE2: 2370,2775 2615,2775 2620,2780 2620,3085 2375,3085 2370,3090
  region net OUT_BLU2: 2860,2775 3105,2775 3110,2780 3110,3085 2865,3085 2860,3090
  region net OUT_RED3: 3355,2770 3600,2770 3605,2775 3605,3080 3360,3080 3355,3085
  region net OUT_GRE3: 3845,2775 4090,2775 4095,2780 4095,3085 3850,3085 3845,3090
  region net OUT_BLU3: 4335,2775 4580,2775 4585,2780 4585,3085 4340,3085 4335,3090
  region net OUT_RED4: 4830,2775 5075,2775 5080,2780 5080,3085 4835,3085 4830,3090
  region net OUT_GRE4: 5320,2780 5565,2780 5570,2785 5570,3090 5325,3090 5320,3095
  region net OUT_BLU4: 5810,2780 6055,2780 6060,2785 6060,3090 5815,3090 5810,3095
  region net OUT_BLU5: 4830,735 5075,735 5080,740 5080,1045 4835,1045 4830,1050
  region net OUT_GRE5: 5320,740 5565,740 5570,745 5570,1050 5325,1050 5320,1055
  region net OUT_RED5: 5810,740 6055,740 6060,745 6060,1050 5815,1050 5810,1055
  region net OUT_BLU6: 3365,735 3610,735 3615,740 3615,1045 3370,1045 3365,1050
  region net OUT_GRE6: 3855,740 4100,740 4105,745 4105,1050 3860,1050 3855,1055
  region net OUT_RED6: 4345,740 4590,740 4595,745 4595,1050 4350,1050 4345,1055
  region net OUT_BLU7: 1895,730 2140,730 2145,735 2145,1040 1900,1040 1895,1045
  region net OUT_GRE7: 2385,735 2630,735 2635,740 2635,1045 2390,1045 2385,1050
  region net OUT_RED7: 2875,735 3120,735 3125,740 3125,1045 2880,1045 2875,1050
  region net OUT_RED8: 1410,740 1655,740 1660,745 1660,1050 1415,1050 1410,1055
  region net OUT_GRE8: 920,740 1165,740 1170,745 1170,1050 925,1050 920,1055
  region net OUT_BLU8: 430,735 675,735 680,740 680,1045 435,1045 430,1050

## Silkscreen, mask and mechanical layers (free items; w line width, h text height)
Top Overlay:
  text "24V" at 5030,3140 h80 r90
  text "RED4" at 5231.65,3140 h80 r90
  text "GRE4" at 5435.02,3140 h80 r90
  text "BLU4" at 5636.67,3140 h80 r90
  text "GND" at 6185,3140 h80 r90
  text "24V" at 6390,3140 h80 r90
  text "GND" at 340,3135 h80 r90
  text "24V" at 135,3130 h80 r90
  text "24V" at 675,3130 h80 r90
  text "RED1" at 876.65,3130 h80 r90
  text "GRE1" at 1080.02,3130 h80 r90
  text "BLU1" at 1281.67,3130 h80 r90
  text "24V" at 3640,3130 h80 r90
  text "RED3" at 3841.65,3130 h80 r90
  text "GRE3" at 4045.02,3130 h80 r90
  text "BLU3" at 4246.67,3130 h80 r90
  text "24V" at 2105,3125 h80 r90
  text "RED2" at 2306.65,3125 h80 r90
  text "GRE2" at 2510.02,3125 h80 r90
  text "BLU2" at 2711.67,3125 h80 r90
  text "DATA IN" at 620,2095 h100 r270
  text "DATA OUT" at 5860,1655 h100 r90
  text "BLU7" at 2288.33,705 h80 r270
  text "GRE7" at 2489.98,705 h80 r270
  text "RED7" at 2693.35,705 h80 r270
  text "24V" at 2895,705 h80 r270
  text "BLU8" at 823.33,700 h80 r270
  text "GRE8" at 1024.98,700 h80 r270
  text "RED8" at 1228.35,700 h80 r270
  text "24V" at 1430,700 h80 r270
  text "BLU6" at 3763.33,700 h80 r270
  text "GRE6" at 3964.98,700 h80 r270
  text "RED6" at 4168.35,700 h80 r270
  text "24V" at 4370,700 h80 r270
  text "BLU5" at 5193.33,700 h80 r270
  text "GRE5" at 5394.98,700 h80 r270
  text "RED5" at 5598.35,700 h80 r270
  text "24V" at 5800,700 h80 r270
Bottom Overlay:
  text "DATA OUT" at 5860,2250 h150 r90
  text "Module Điều Khiển Đèn RGB  / TCM V1" at 5305,1795 h230
  text "DATA IN" at 605,1620 h150 r270
Bottom Solder:
  drawing of 148 lines, arcs and shapes, not listed

## Dimensions
6475,3830 to 6475,0 on Top Overlay
0,0 to 6475,0 on Top Overlay